# Altium PCB PCB1.PcbDoc
Units mil, origin at the board's own origin, x right, y up, seen from the top; angles counter-clockwise.
Board outline 6000 x 4000 mil, 2 copper layers (Top Layer, Bottom Layer); 6 components, 7 nets, 83 pads, 0 vias.
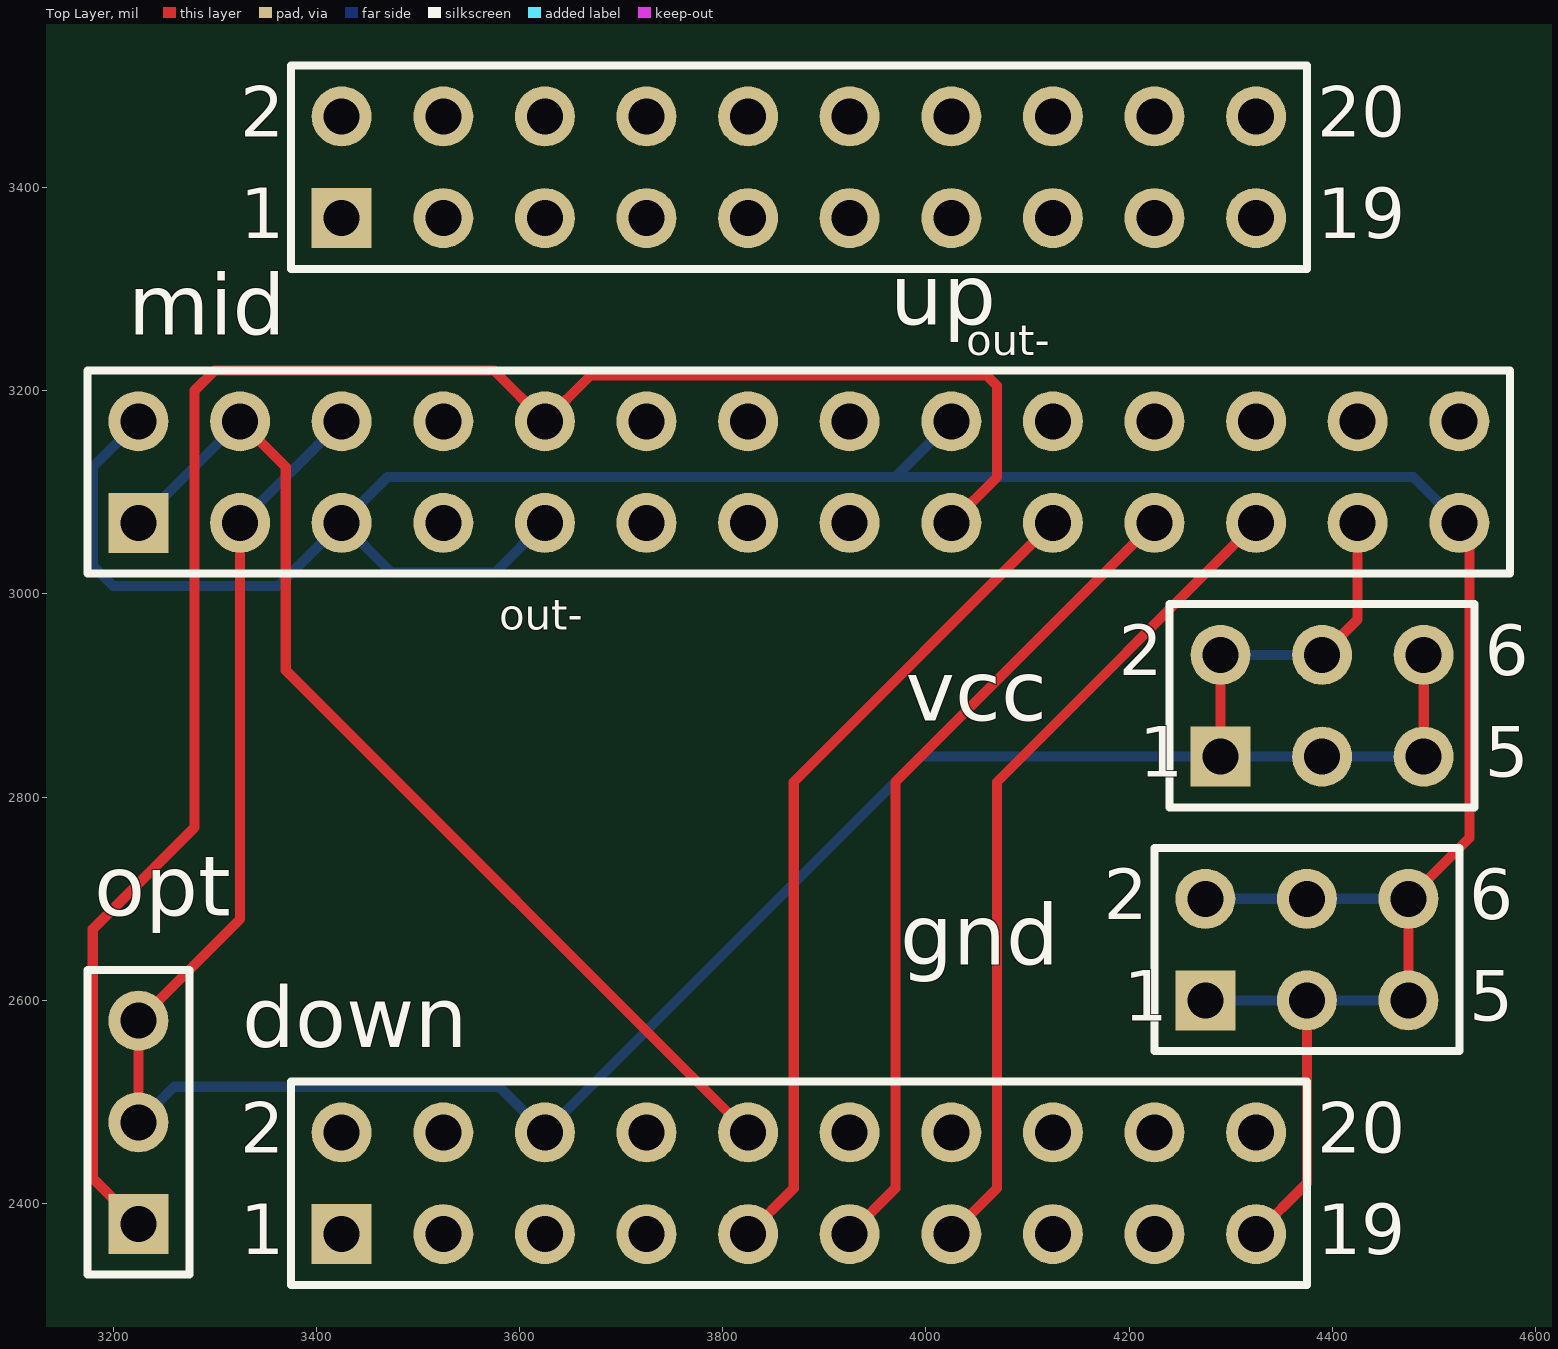
[diagram p0: Top Layer view]
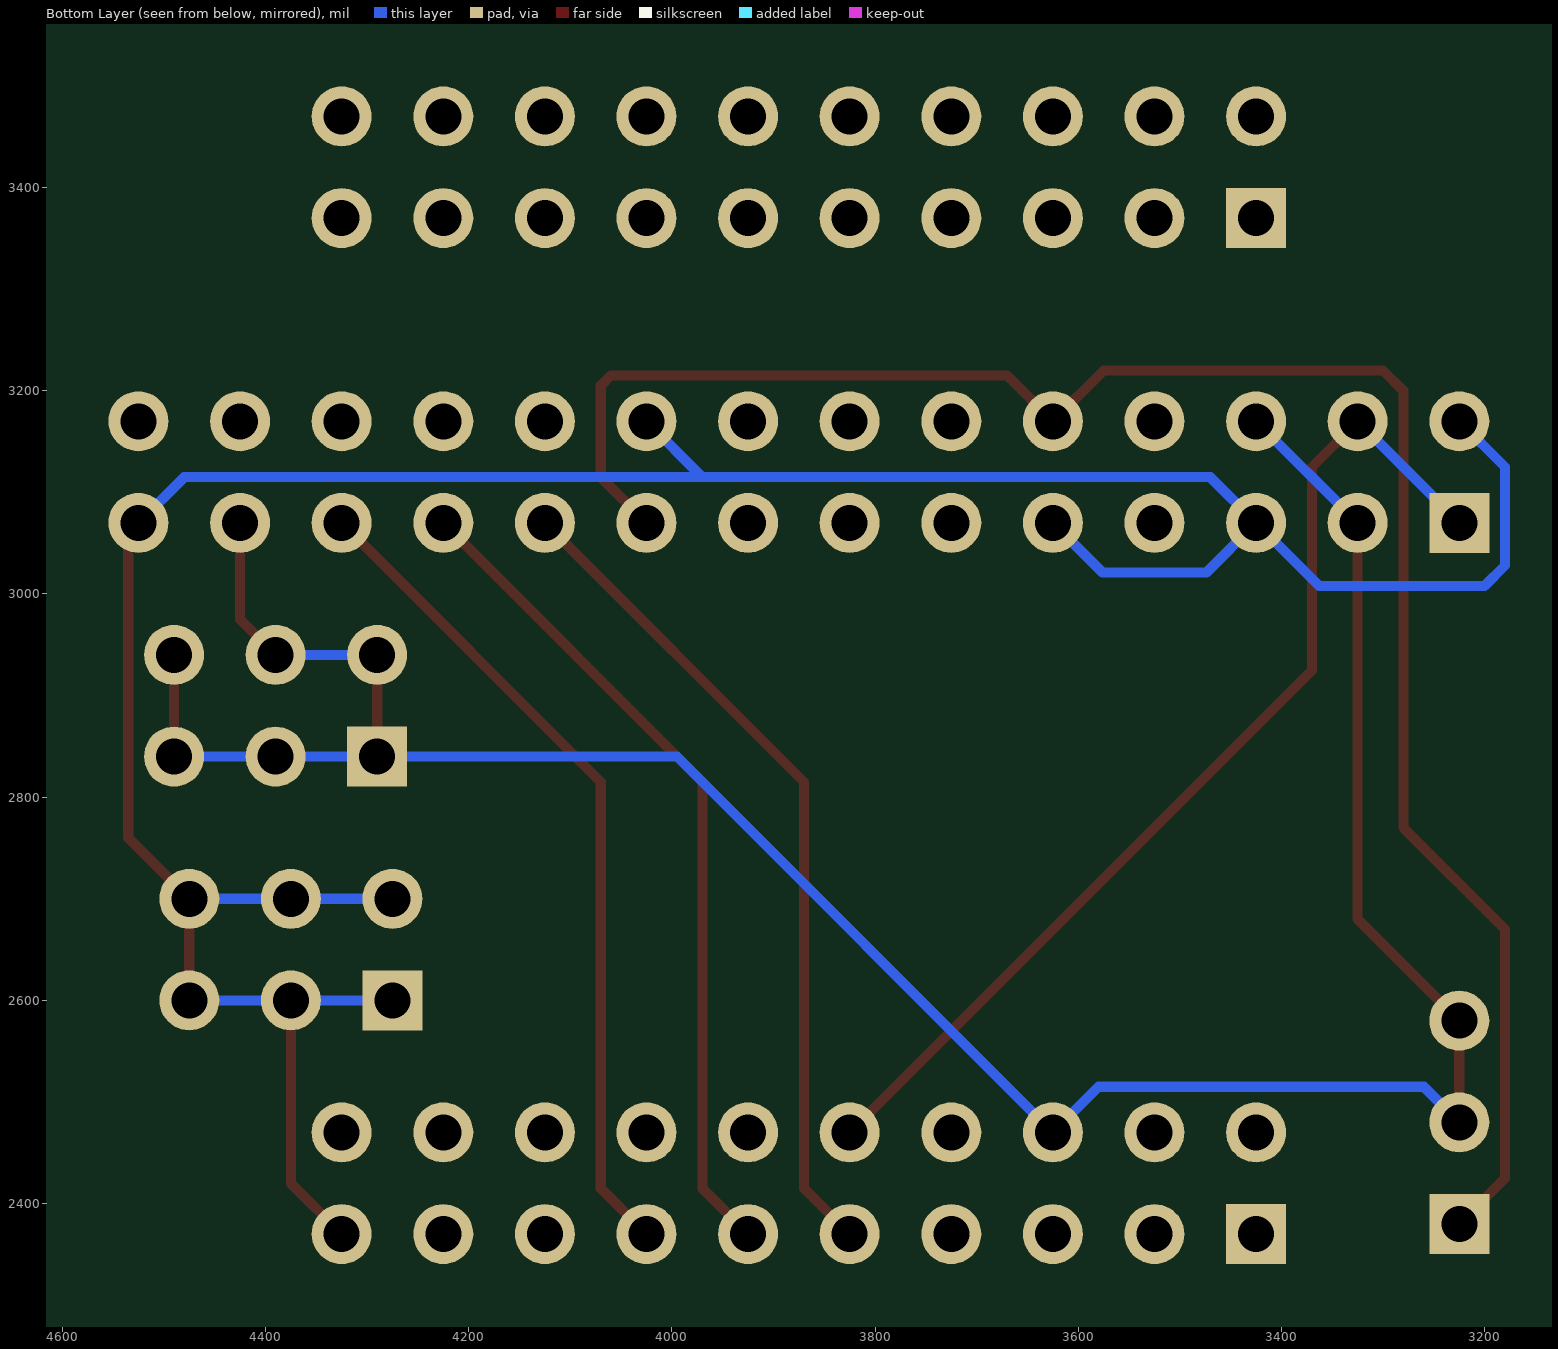
[diagram p1: Bottom Layer view, seen from below]

## Layer stack, top to bottom
Top Solder: solder mask 0.4, Solder Resist, Dk 3.5
Top Layer: signal copper 1.4
Dielectric 1: dielectric 12.6, FR-4, Dk 4.8
Bottom Layer: signal copper 1.4
Bottom Solder: solder mask 0.4, Solder Resist, Dk 3.5

## Board outline
1000,1000 7000,1000 7000,5000 1000,5000

## Design rules (kind name [scope] priority, off if disabled: settings)
Clearance [All] p1: gap=10 ignorepadtopadclearanceinfootprint=FALSE except(0: Arc-Hole Track-Hole SMDPad-Hole THPad-Hole Via-Hole Fill-Hole Poly-Hole Region-Hole Text-Hole)
PolygonConnect [All] p1: connectstyle=Relief reliefconductorwidth=10 reliefentries=4 polygonreliefangle="90 Angle" airgapwidth=10
RoomDefinition Sheet1 [InComponentClass('Sheet1')] p1: confinementstyle=ConfineIn formatcopy=TRUE lockcomponents=FALSE outline 3080,2235 4660,2235 4660,3585 3080,3585
RoutingVias [All] p1: holewidth=28 width=50 viastyle="Through Hole" minholewidth=28 minwidth=50 maxholewidth=28 maxwidth=50
SolderMaskExpansion [All] p1: expansion=4
Width [All] p1: maxlimit=10 minlimit=10 preferedwidth=10
30 further rules are at their usual default settings.

## Components (designator, comment, footprint, x,y, rotation, side; value= is the part's Value field where it differs from the comment)
down "Header 10X2" HDR2X10 3425,2370 r0 top
gnd "Header 3X2" HDR2X3 4275,2600 r0 top
mid "Header 14X2" HDR2X14 3225,3070 r0 top
opt "Header 3" HDR1X3 3225,2380 r90 top
up "Header 10X2" HDR2X10 3425,3370 r0 top
vcc "Header 3X2" HDR2X3 4290,2840 r0 top

## Footprints (in the part's own frame and the unit in brackets; to place one, negate y for a bottom-side part, rotate by r counter-clockwise, add the part's x,y. Pads: shape width x height; smd on the part's side, far side on the other; paste and mask are expansions set on the pad)
HDR1X3 [mm] "Connector; Header; 3 Position"
  rect 1.5x1.5 hole 0.9: 1(0,0)
  round 1.5 hole 0.9: 2(2.54,0) 3(5.08,0)
  silkscreen extent -1.27,-1.27 6.35,1.27
HDR2X3 [mm] "Connector; Header; 3x2 Position"
  rect 1.5x1.5 hole 0.9: 1(0,0)
  round 1.5 hole 0.9: 2(0,2.54) 3(2.54,0) 4(2.54,2.54) 5(5.08,0) 6(5.08,2.54)
  silkscreen extent -1.27,-1.27 6.35,3.81
HDR2X10 [mm] "Connector; Header; 10x2 Position"
  rect 1.5x1.5 hole 0.9: 1(0,0)
  round 1.5 hole 0.9: 2(0,2.54) 3(2.54,0) 4(2.54,2.54) 5(5.08,0) 6(5.08,2.54) 7(7.62,0) 8(7.62,2.54) 9(10.16,0) 10(10.16,2.54) 11(12.7,0) 12(12.7,2.54) 13(15.24,0) 14(15.24,2.54) 15(17.78,0) 16(17.78,2.54) 17(20.32,0) 18(20.32,2.54) 19(22.86,0) 20(22.86,2.54)
  silkscreen extent -1.27,-1.27 24.13,3.81
HDR2X14 [mm] "Connector; Header; 14x2 Position"
  rect 1.5x1.5 hole 0.9: 1(0,0)
  round 1.5 hole 0.9: 2(0,2.54) 3(2.54,0) 4(2.54,2.54) 5(5.08,0) 6(5.08,2.54) 7(7.62,0) 8(7.62,2.54) 9(10.16,0) 10(10.16,2.54) 11(12.7,0) 12(12.7,2.54) 13(15.24,0) 14(15.24,2.54) 15(17.78,0) 16(17.78,2.54) 17(20.32,0) 18(20.32,2.54) 19(22.86,0) 20(22.86,2.54) 21(25.4,0) 22(25.4,2.54) 23(27.94,0) 24(27.94,2.54) 25(30.48,0) 26(30.48,2.54) 27(33.02,0) 28(33.02,2.54)
  silkscreen extent -1.27,-1.27 34.29,3.81

## Part data
down up: "Header, 10-Pin, Dual row", LatestRevisionDate=17-Jul-2002, LatestRevisionNote="Re-released for DXP Platform.", Publisher="Altium Limited"
gnd vcc: "Header, 3-Pin, Dual row", LatestRevisionDate=17-Jul-2002, LatestRevisionNote="Re-released for DXP Platform.", Publisher="Altium Limited"
mid: "Header, 14-Pin, Dual row", LatestRevisionDate=17-Jul-2002, LatestRevisionNote="Re-released for DXP Platform.", Publisher="Altium Limited"
opt: "Header, 3-Pin", LatestRevisionDate=17-Jul-2002, LatestRevisionNote="Re-released for DXP Platform.", Publisher="Altium Limited"

## Nets (pads, with @x,y where several pads share a name; then routed paths per layer and width w, separated by ;. In a path a pad name is that pad's centre, name@x,y a point inside that pad or via, vN(x,y) a via of type N, cw(c..) or ccw(c..) an arc to the next point about the centre after c; other vN are vias at no path point)
Netdown_6: down.6 mid.3 mid.6 mid.25 opt.2 opt.3 vcc.1 vcc.2 vcc.3 vcc.4 vcc.5 vcc.6 | length 2668.7
  Top Layer w10: opt.2 opt.3 3325,2680 mid.3 ; vcc.1 vcc.2 ; vcc.4 4425,2975 mid.25 ; vcc.5 vcc.6
  Bottom Layer w10: opt.2 3260,2515 3580,2515 down.6 3995,2840 vcc.1 vcc.3 vcc.5 ; mid.3 mid.6 ; vcc.2 vcc.4
Netdown_9: down.9 mid.19 | length 824.3
  Top Layer w10: down.9 3870,2415 3870,2815 mid.19
Netdown_10: down.10 mid.1 mid.4 | length 1048.5
  Top Layer w10: mid.4 3370,3125 3370,2925 down.10
  Bottom Layer w10: mid.1 mid.4
Netdown_11: down.11 mid.21 | length 824.3
  Top Layer w10: down.11 3970,2415 3970,2815 mid.21
Netdown_13: down.13 mid.23 | length 824.3
  Top Layer w10: down.13 4070,2415 4070,2815 mid.23
Netdown_19: down.19 gnd.1 gnd.2 gnd.3 gnd.4 gnd.5 gnd.6 mid.2 mid.5 mid.9 mid.18 mid.27 | length 3050.8
  Top Layer w10: down.19 4375,2420 gnd.3 ; gnd.5 gnd.6 4535,2760 4535,3070 mid.27
  Bottom Layer w10: mid.2 3180,3125 3180,3028 3200,3008 3363,3008 mid.5 ; mid.9 3576,3021 3474,3021 mid.5 ; mid.18 3970,3115 ; gnd.1 gnd.3 gnd.5 ; gnd.2 gnd.4 gnd.6 ; mid.27 4480,3115 3970,3115 ; mid.5 3470,3115 3970,3115
Netmid_10: mid.10 mid.17 opt.1 | length 1875.5
  Top Layer w10: opt.1 3180,2425 3180,2670 3280,2770 3280,3200 3300,3220 3575,3220 mid.10 3670,3215 4060,3215 4070,3205 4070,3115 mid.17
pads on no net: down.1 down.2 down.3 down.4 down.5 down.7 down.8 down.12 down.14 down.15 down.16 down.17 down.18 down.20 mid.7 mid.8 mid.11 mid.12 mid.13 mid.14 mid.15 mid.16 mid.20 mid.22 mid.24 mid.26 mid.28 up.1 up.2 up.3 up.4 up.5 up.6 up.7 up.8 up.9 up.10 up.11 up.12 up.13 up.14 up.15 up.16 up.17 up.18 up.19 up.20

## Silkscreen, mask and mechanical layers (free items; w line width, h text height)
Top Overlay:
  text "out-" at 4040,3235 h30
  text "out-" at 3580,2965 h30
Mechanical 1:
  lines w10: 3140,2315 3140,3500 3185,3545 3230,3545 4560,3545 4610,3495 4610,2335 4555,2280 3175,2280 3140,2315

## Text inside footprints (layer, text, board x,y; h text height)
down: Top Overlay "20" at 4385,2450 h50; Top Overlay "19" at 4385,2350 h50; Top Overlay "1" at 3325,2350 h50; Top Overlay "2" at 3325,2450 h50
gnd: Top Overlay "6" at 4535,2680 h50; Top Overlay "5" at 4535,2580 h50; Top Overlay "2" at 4175,2680 h50; Top Overlay "1" at 4195,2580 h50
up: Top Overlay "20" at 4385,3450 h50; Top Overlay "19" at 4385,3350 h50; Top Overlay "1" at 3325,3350 h50; Top Overlay "2" at 3325,3450 h50
vcc: Top Overlay "6" at 4550,2920 h50; Top Overlay "5" at 4550,2820 h50; Top Overlay "2" at 4190,2920 h50; Top Overlay "1" at 4210,2820 h50